# Altium PCB PCB1.PcbDoc
Units mil, origin at the board's own origin, x right, y up, seen from the top; angles counter-clockwise.
Board outline 2850 x 2185 mil, 2 copper layers (Top Layer, Bottom Layer); 32 components, 126 nets, 266 pads, 0 vias.
Unrouted connection lines stored in the file: 182.
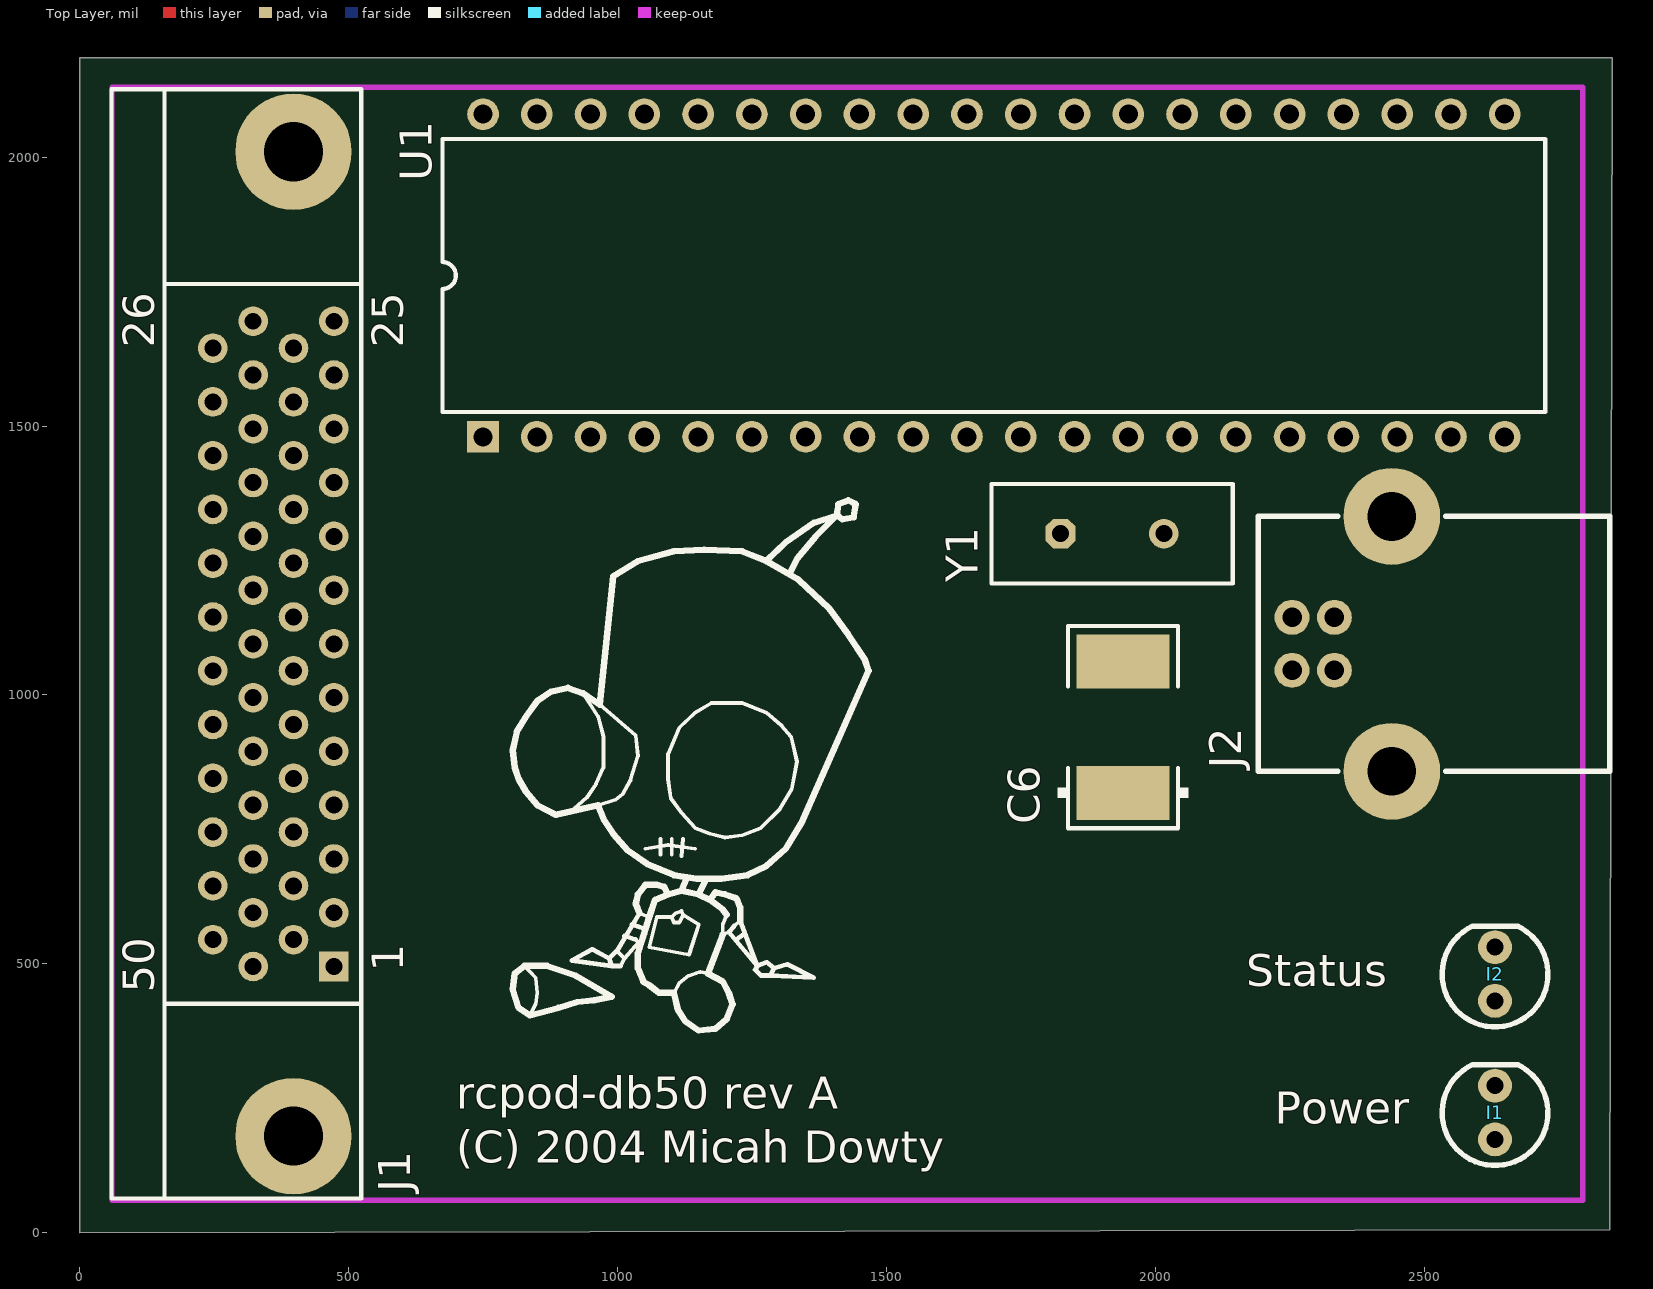
[diagram p0: Top Layer view]
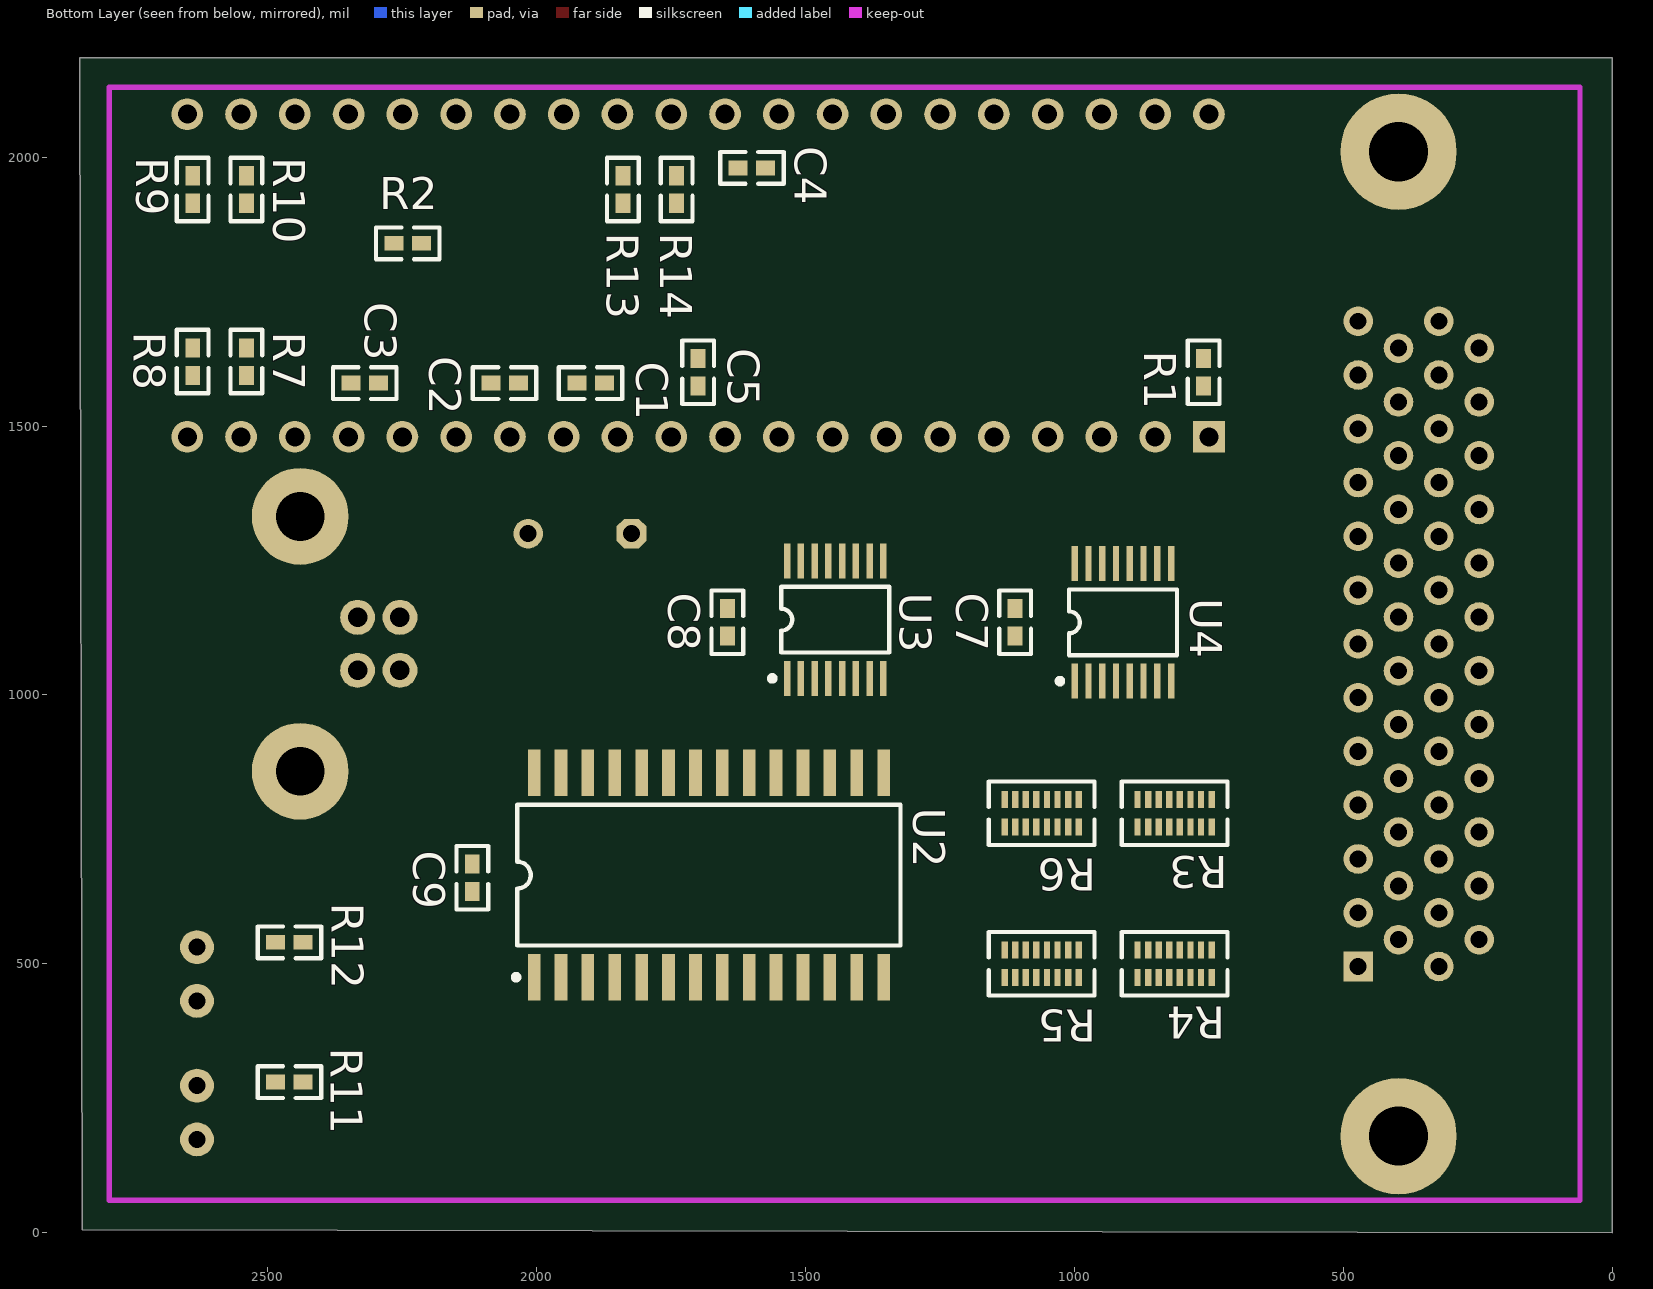
[diagram p1: Bottom Layer view, seen from below]

## Layer stack, top to bottom
Top Layer: signal copper 1.4
Dielectric: dielectric 12.6, FR-4, Dk 4.8
Bottom Layer: signal copper 1.4

## Board outline
0,0 2845,5 2850,2185 0,2185

## Design rules (kind name [scope] priority, off if disabled: settings)
Clearance [All] p1: gap=6
ComponentClearance [All] p1: gap=10 collisioncheckmode=0
PolygonConnect [All] p1: connectstyle=Relief reliefconductorwidth=10 reliefentries=4 polygonreliefangle="90 Angle"
RoomDefinition Sheet1 [InComponentClass('Sheet1')] p1: confinementstyle=ConfineIn formatcopy=TRUE outline 3940,6840 7320,6840 7320,7500 3940,7500
RoutingLayers [All] p1: top layer=Horizontal bottom layer=Vertical
RoutingVias [All] p1: holewidth=15 width=25 viastyle="Through Hole" minholewidth=15 minwidth=25 maxholewidth=15 maxwidth=25
SolderMaskExpansion [All] p1: expansion=4
TestPointUsage [All] p1: valid=0 allowmultiple=FALSE
Testpoint [All] p1: side=15 testpointundercomponent=TRUE minsize=40 maxsize=100 preferedsize=60 minholesize=0 maxholesize=40 preferedholesize=32 testpointgrid=1 style=1023 order=1234567890
Width Width_power [(InNet('VCC') or InNet('GND'))] p1: maxlimit=20 minlimit=10 preferedwidth=10 toplayer_minwidth=20 toplayer_prefwidth=20 bottomlayer_minwidth=20 bottomlayer_prefwidth=20 minimp=50.000000 maximp=50.000000 favimp=50.000000
Width [All] p2: maxlimit=10 minlimit=6 preferedwidth=10 minimp=50.000000 maximp=50.000000 favimp=50.000000
16 further rules are at their usual default settings.

## Components (designator, comment, footprint, x,y, rotation, side; value= is the part's Value field where it differs from the comment)
C1 "Cap2" C1005-0402 1900,1580 r0 bottom
C2 "Cap2" C1005-0402 2060,1580 r180 bottom
C3 "" C1005-0402 2320,1580 r0 bottom
C4 "" C1005-0402 1600,1980 r180 bottom
C5 "" C1005-0402 1700,1600 r270 bottom
C6 "10uF" SO-C2/X4.4 1940,940 r90 top (schematic designator C4)
C7 "" C1005-0402 1110.43,1135 r270 bottom
C8 "" C1005-0402 1645.43,1135 r270 bottom
C9 "" C1005-0402 2120,660 r270 bottom
I1 "Power" LED-1-UNBROKE 2632,223.37 r180 top (schematic designator I3)
I2 "Status" LED-1-UNBROKE 2632,481 r180 top (schematic designator I3)
J1 "DB-50" CHAMP1.27-2H50-SIMPLE 60,1095 r90 top (schematic designator J2)
J2 "USB" USB-TYPEB 2440,858 r90 top (schematic designator J1)
R1 "Res1" C1005-0402 760,1600 r90 bottom
R2 "Res1" C1005-0402 2240,1840 r180 bottom
R3 "" EXB2HV 745,780 r270 bottom
R4 "" EXB2HV 745,500 r270 bottom
R5 "" EXB2HV 1130,500 r90 bottom
R6 "" EXB2HV 1130,780 r90 bottom
R7 "" C1005-0402 2540,1620 r270 bottom
R8 "" C1005-0402 2640,1620 r270 bottom
R9 "" C1005-0402 2640,1940 r90 bottom
R10 "" C1005-0402 2540,1940 r90 bottom
R11 "" C1005-0402 2460,280 r180 bottom
R12 "" C1005-0402 2460,540 r180 bottom
R13 "" C1005-0402 1840,1940 r270 bottom
R14 "" C1005-0402 1740,1940 r270 bottom
U1 "PIC16C765" DIP-40 1700,1780 r0 top
U2 "DG406 / MAX306 / MPC506" SO-G28/G7.45 1680,665 r180 bottom
U3 "DAC8574" TSSO5X6-G16 1445,1140 r180 bottom
U4 "DAC8574" TSSO5X6-G16 910,1135 r180 bottom
Y1 "6 MHz" BCY-W2/E4.7 1920,1300 r0 top

## Footprints (in the part's own frame and the unit in brackets; to place one, negate y for a bottom-side part, rotate by r counter-clockwise, add the part's x,y. Pads: shape width x height; smd on the part's side, far side on the other; paste and mask are expansions set on the pad)
BCY-W2/E4.7 [mm]
  oct 1.4x1.4 hole 0.8: 1(-2.44,0)
  round 1.4 hole 0.8: 2(2.44,0)
  silkscreen extent -5.7,-2.35 5.7,2.35
C1005-0402 [mm]
  rect 0.9x0.7 smd: 1(-0.65,0) 2(0.65,0)
  silkscreen extent -1.5,-0.75 1.5,0.75
CHAMP1.27-2H50-SIMPLE [mm]
  rect 1.4x1.4 hole 0.8: 1(-15.24,-10.478)
  round 1.4 hole 0.8: 2(-13.97,-8.573) 3(-12.7,-10.478) 4(-11.43,-8.572) 5(-10.16,-10.477) 6(-8.89,-8.572) 7(-7.62,-10.477) 8(-6.35,-8.572) 9(-5.08,-10.477) 10(-3.81,-8.572) 11(-2.54,-10.477) 12(-1.27,-8.572) 13(0,-10.477) 14(1.27,-8.572) 15(2.54,-10.477) 16(3.81,-8.572) 17(5.08,-10.477) 18(6.35,-8.572) 19(7.62,-10.477) 20(8.89,-8.572) 21(10.16,-10.477) 22(11.43,-8.572) 23(12.7,-10.477) 24(13.97,-8.572) 25(15.24,-10.477) 26(15.24,-6.667) 27(13.97,-4.762) 28(12.7,-6.667) 29(11.43,-4.762) 30(10.16,-6.667) 31(8.89,-4.762) 32(7.62,-6.667) 33(6.35,-4.762) 34(5.08,-6.667) 35(3.81,-4.763) 36(2.54,-6.667) 37(1.27,-4.763) 38(0,-6.667) 39(-1.27,-4.763) 40(-2.54,-6.667) 41(-3.81,-4.763) 42(-5.08,-6.667) 43(-6.35,-4.763) 44(-7.62,-6.667) 45(-8.89,-4.763) 46(-10.16,-6.667) 47(-11.43,-4.763) 48(-12.7,-6.668) 49(-13.97,-4.763) 50(-15.24,-6.668)
  round 5.5 hole 2.8: 51(-23.25,-8.573) 52(23.25,-8.572)
  silkscreen extent -26.2,-11.78 26.2,0.02
DIP-40 [mm]
  rect 1.5x1.5 hole 0.9: 1(-24.13,-7.62)
  round 1.5 hole 0.9: 2(-21.59,-7.62) 3(-19.05,-7.62) 4(-16.51,-7.62) 5(-13.97,-7.62) 6(-11.43,-7.62) 7(-8.89,-7.62) 8(-6.35,-7.62) 9(-3.81,-7.62) 10(-1.27,-7.62) 11(1.27,-7.62) 12(3.81,-7.62) 13(6.35,-7.62) 14(8.89,-7.62) 15(11.43,-7.62) 16(13.97,-7.62) 17(16.51,-7.62) 18(19.05,-7.62) 19(21.59,-7.62) 20(24.13,-7.62) 21(24.13,7.62) 22(21.59,7.62) 23(19.05,7.62) 24(16.51,7.62) 25(13.97,7.62) 26(11.43,7.62) 27(8.89,7.62) 28(6.35,7.62) 29(3.81,7.62) 30(1.27,7.62) 31(-1.27,7.62) 32(-3.81,7.62) 33(-6.35,7.62) 34(-8.89,7.62) 35(-11.43,7.62) 36(-13.97,7.62) 37(-16.51,7.62) 38(-19.05,7.62) 39(-21.59,7.62) 40(-24.13,7.62)
  silkscreen extent -26.05,-6.45 26.05,6.45
EXB2HV [mm]
  rect 0.8x0.3 smd: 1(-0.65,0) 2(-0.65,-0.5) 3(-0.65,-1) 4(-0.65,-1.5) 5(-0.65,-2) 6(-0.65,-2.5) 7(-0.65,-3) 8(-0.65,-3.5) 9(0.65,-3.5) 10(0.65,-3) 11(0.65,-2.5) 12(0.65,-2) 13(0.65,-1.5) 14(0.65,-1) 15(0.65,-0.5) 16(0.65,0)
  silkscreen extent -1.5,-4.25 1.5,0.75
LED-1-UNBROKE [mm]
  round 1.6 hole 0.8: 1(0,1.27) 2(0,-1.27)
  silkscreen extent -2.5,-2.27 2.5,2.5
SO-C2/X4.4 [mm]
  rect 2.55x4.4 smd: 1(-3.1,0) 2(3.1,0)
  silkscreen extent -4.77,-3.1 4.77,3.09
SO-G28/G7.45 [mm]
  rect 0.6x2.2 smd: 1(-8.255,-4.825) 2(-6.985,-4.825) 3(-5.715,-4.825) 4(-4.445,-4.825) 5(-3.175,-4.825) 6(-1.905,-4.825) 7(-0.635,-4.825) 8(0.635,-4.825) 9(1.905,-4.825) 10(3.175,-4.825) 11(4.445,-4.825) 12(5.715,-4.825) 13(6.985,-4.825) 14(8.255,-4.825) 15(8.255,4.825) 16(6.985,4.825) 17(5.715,4.825) 18(4.445,4.825) 19(3.175,4.825) 20(1.905,4.825) 21(0.635,4.825) 22(-0.635,4.825) 23(-1.905,4.825) 24(-3.175,4.825) 25(-4.445,4.825) 26(-5.715,4.825) 27(-6.985,4.825) 28(-8.255,4.825)
  silkscreen extent -9.23,-4.95 9.05,3.33
TSSO5X6-G16 [mm]
  rect 0.3x1.65 smd: 1(-2.275,-2.775) 2(-1.625,-2.775) 3(-0.975,-2.775) 4(-0.325,-2.775) 5(0.325,-2.775) 6(0.975,-2.775) 7(1.625,-2.775) 8(2.275,-2.775) 9(2.275,2.775) 10(1.625,2.775) 11(0.975,2.775) 12(0.325,2.775) 13(-0.325,2.775) 14(-0.975,2.775) 15(-1.625,2.775) 16(-2.275,2.775)
  silkscreen extent -3.1,-2.9 2.55,1.55
USB-TYPEB [mil]
  round 65 hole 36.22: 1(286.22,185.43) 2(187.8,185.43) 3(187.8,106.69) 4(286.22,106.69)
  round 180 hole 90.55: 5(0,0) 5(474.02,0)
  silkscreen extent 0,-406 474,248

## Part data
C1 C2: "Capacitor"
C3 C4 C5 C7 C8 C9: library part Cap2, "Capacitor"
C6: library part "Cap Pol1", "Polarized Capacitor (Radial)"
I1 I2: library part LED1, "Typical RED GaAs LED"
J1: library part "Connector 50", "Receptacle Header Assemby"
J2: library part "USB Type B", "Header, 4-Pin"
R1 R2: "Resistor"
R3 R4 R5 R6: library part "Res Pack3", "Resistor Array"
R7 R8 R9 R10 R11 R12 R13 R14: library part Res1, "Resistor"
U1: "EPROM-Based 8-Bit CMOS Microcontroller with USB"
U2: library part MAX306EPI, "Precision, 16-Channel High-performance, CMOS Analog Multiplexer"
U3 U4: "Quad 16-Bit Low Power Voltage Output I2C Interface DAC"
Y1: library part XTAL, "Crystal Oscillator"

## Nets (pads, with @x,y where several pads share a name; then routed paths per layer and width w, separated by ;. In a path a pad name is that pad's centre, name@x,y a point inside that pad or via, vN(x,y) a via of type N, cw(c..) or ccw(c..) an arc to the next point about the centre after c; other vN are vias at no path point)
GND: C1.1 C2.1 C3.1 C4.1 C5.1 C6.2 C7.1 C8.1 C9.1 J1.1 J1.51 J1.52 J2.4 J2.5 R4.9 R4.10 R4.11 R4.12 R4.13 R4.14 R4.15 R4.16 R6.9 R6.10 R6.11 R6.12 R6.13 R6.14 R6.15 R6.16 R7.1 R8.1 R9.1 R10.1 R11.2 R12.2 U1.12 U1.31 U2.12 U2.27 U3.5 U3.6 U3.9 U3.13 U3.15 U3.16 U4.5 U4.6 U4.9 U4.15 U4.16
NetC1_2: C1.2 U1.13 Y1.1
NetC2_2: C2.2 U1.14 Y1.2
NetC3_2: C3.2 R2.1 U1.18
NetI1_1: 
NetI1_2: I1.2 R11.1
NetI2_2: I2.2 R12.1
NetI3_1: 
NetJ2_1: 
NetJ2_2: R2.2
NetJ2_2: J2.2 U1.23
NetJ2_3: 
NetJ2_3: J2.3 U1.24
NetJ2_4: 
NetJ2_5: 
NetJ2_6: 
NetJ2_7: 
NetJ2_8: 
NetJ2_9: 
NetJ2_10: 
NetJ2_11: 
NetJ2_12: 
NetJ2_13: 
NetJ2_14: 
NetJ2_15: 
NetJ2_16: 
NetJ2_17: 
NetJ2_18: 
NetJ2_19: 
NetJ2_20: 
NetJ2_21: 
NetJ2_22: 
NetJ2_23: 
NetJ2_24: 
NetJ2_25: 
NetJ2_26: 
NetJ2_27: 
NetJ2_28: 
NetJ2_29: 
NetJ2_30: 
NetJ2_31: 
NetJ2_32: 
NetJ2_33: 
NetJ2_34: 
NetJ2_35: 
NetJ2_36: 
NetJ2_37: 
NetJ2_38: 
NetJ2_39: 
NetJ2_40: 
NetJ2_41: 
NetJ2_42: 
NetJ2_43: 
NetJ2_44: 
NetR1_1: R1.1 U1.1
NetR3_1: R3.1 U2.19
NetR3_2: R3.2 U2.20
NetR3_3: R3.3 U2.21
NetR3_4: R3.4 U2.22
NetR3_5: R3.5 U2.23
NetR3_6: R3.6 U2.24
NetR3_7: R3.7 U2.25
NetR3_8: R3.8 U2.26
NetR5_1: R5.1 U2.11
NetR5_2: R5.2 U2.10
NetR5_3: R5.3 U2.9
NetR5_4: R5.4 U2.8
NetR5_5: R5.5 U2.7
NetR5_6: R5.6 U2.6
NetR5_7: R5.7 U2.5
NetR5_8: R5.8 U2.4
NetR7_2: R7.2 U1.19 U2.17
NetR8_2: R8.2 U1.20 U2.16
NetR9_2: R9.2 U1.21 U2.15
NetR10_2: R10.2 U1.22 U2.14
NetU1_2: U1.2 U2.28
PIN3: J1.3 U1.3
PIN4: J1.4 U1.4
PIN5: J1.5 U1.5
PIN6: J1.6 U1.6
PIN7: J1.7 U1.7
PIN8: J1.8 U1.8
PIN9: J1.9 U1.9
PIN10: J1.10 U1.10
PIN11: J1.11 U1.33
PIN12: J1.12 U1.34
PIN13: J1.13 U1.35
PIN14: J1.14 U1.36
PIN15: J1.15 U1.37
PIN16: J1.16 U1.38
PIN17: J1.17 U1.39
PIN18: J1.18 U1.40
PIN19: J1.19 U1.15
PIN20: J1.20 U1.16
PIN21: J1.21 U1.25
PIN22: J1.22 U1.26
PIN23: J1.23 U1.27
PIN24: J1.24 U1.28
PIN27: J1.27 R3.16 R4.1
PIN28: J1.28 R3.15 R4.2
PIN29: J1.29 R3.14 R4.3
PIN30: J1.30 R3.13 R4.4
PIN31: J1.31 R3.12 R4.5
PIN32: J1.32 R3.11 R4.6
PIN33: J1.33 R3.10 R4.7
PIN34: J1.34 R3.9 R4.8
PIN35: J1.35 R5.16 R6.1
PIN36: J1.36 R5.15 R6.2
PIN37: J1.37 R5.14 R6.3
PIN38: J1.38 R5.13 R6.4
PIN39: J1.39 R5.12 R6.5
PIN40: J1.40 R5.11 R6.6
PIN41: J1.41 R5.10 R6.7
PIN42: J1.42 R5.9 R6.8
PIN43: J1.43 U3.1
PIN44: J1.44 U3.2
PIN45: J1.45 U3.7
PIN46: J1.46 U3.8
PIN47: J1.47 U4.1
PIN48: J1.48 U4.2
PIN49: J1.49 U4.7
PIN50: J1.50 U4.8
SCL: J1.25 R13.1 U1.29 U3.10 U4.10
SDA: J1.26 R14.1 U1.30 U3.11 U4.11
STATUS_LED: I2.1 U1.17
VCC: C4.2 C5.2 C6.1 C7.2 C8.2 C9.2 I1.1 J1.2 J2.1 R1.2 R13.2 R14.2 U1.11 U1.32 U2.1 U2.18 U3.3 U3.4 U3.12 U3.14 U4.3 U4.4 U4.12 U4.13 U4.14
pads on no net: U2.2 U2.3 U2.13

## Keep-outs
Keep-Out Layer:
  lines w10: 60,60 60,2130 2795,2130 2795,60 60,60

## Silkscreen, mask and mechanical layers (free items; w line width, h text height)
Top Overlay:
  drawing of 181 lines, arcs and shapes, not listed
  text "rcpod-db50 rev A" at 700,230 h60
  text "(C) 2004 Micah Dowty" at 700,130 h60
Mechanical 1:
  lines w10: 0,0 0,2185 2850,2185 2850,0 0,0

## Text inside footprints (layer, text, board x,y; h text height)
J1: Top Overlay "1" at 601.44,485.16 h59.06 r90; Top Overlay "25" at 601.44,1645.79 h59.06 r90; Top Overlay "50" at 138.84,445.79 h59.06 r90; Top Overlay "26" at 138.84,1645.79 h59.06 r90